# Altium PCB classyTKL_SMK.PcbDoc (part 2 of 2)
Units mm, origin at the board's own origin, x right, y up, seen from the top; angles counter-clockwise.
Board outline 346.59 x 122.85 mm, 2 copper layers (Component Side, Bottom Layer), stack 1.571 mm thick; 201 components, 128 nets, 842 pads, 69 vias.
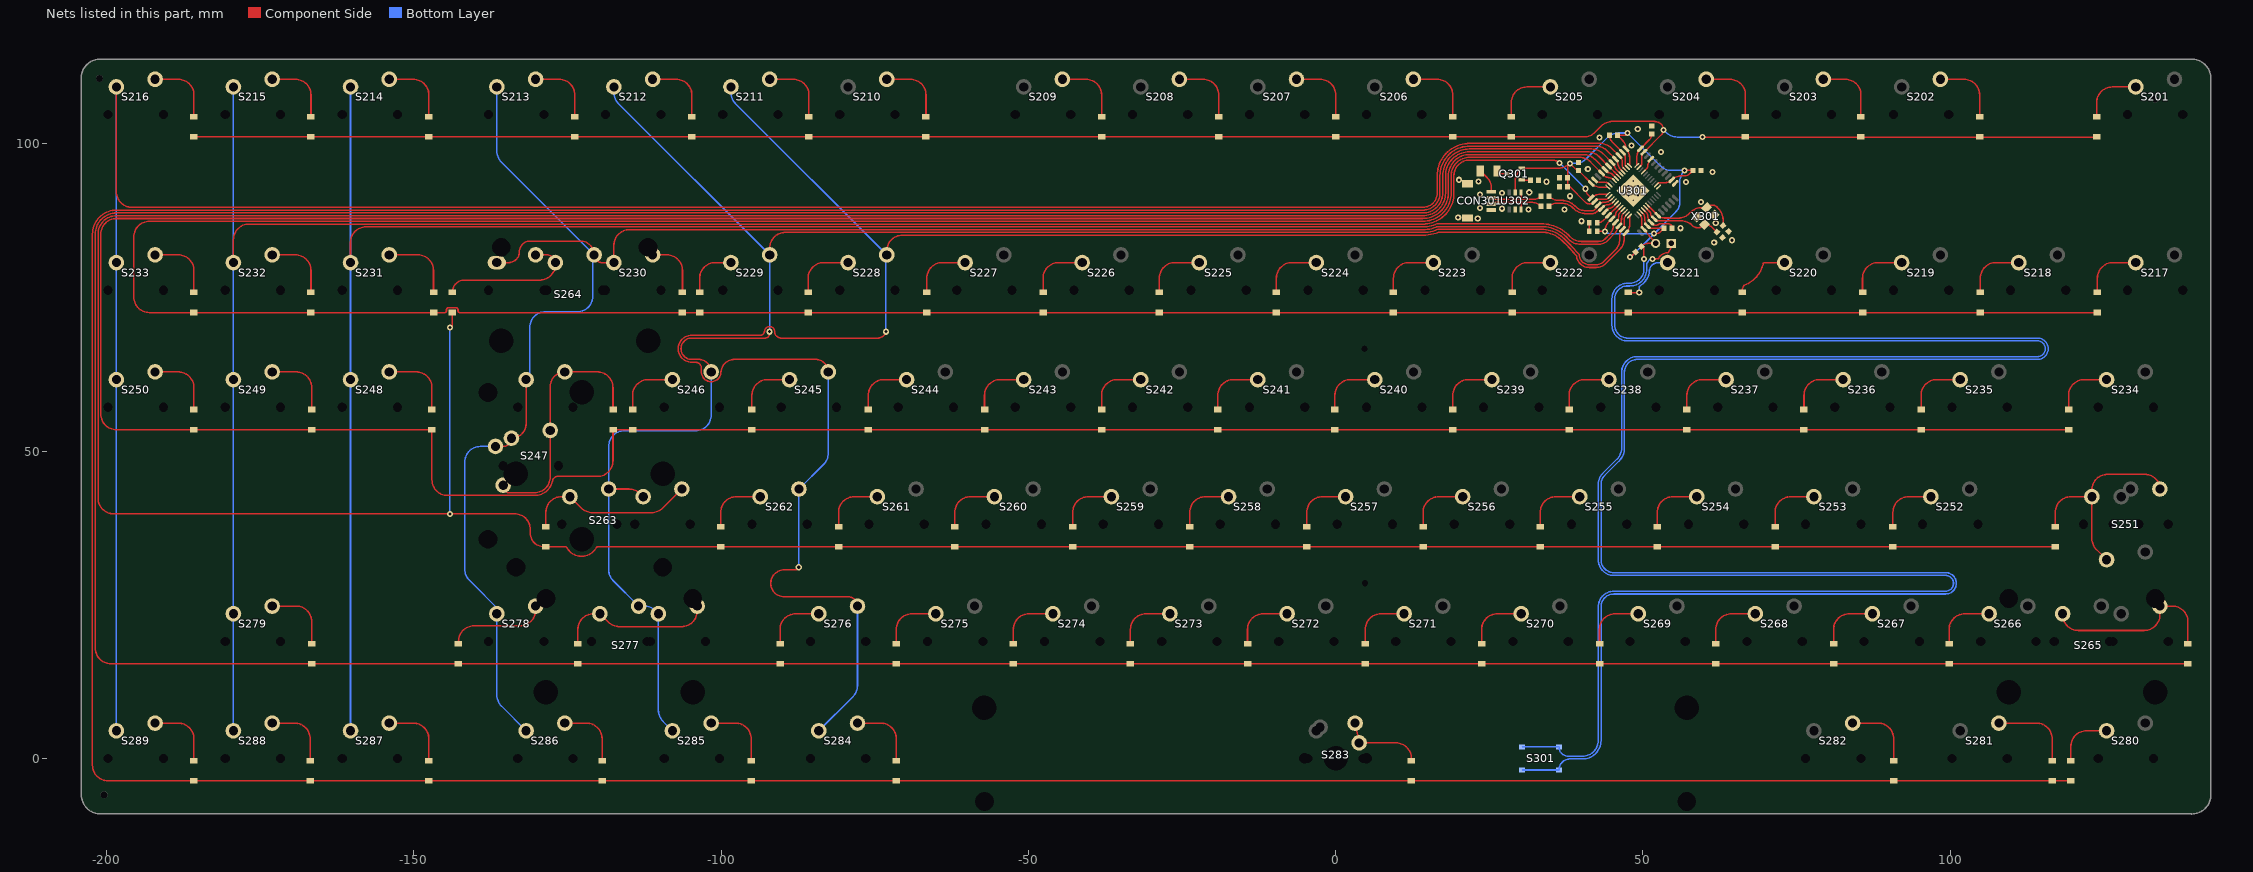
[diagram p2: the nets of this part, all layers, seen from the top]

## Via types
v1: diameter 1, hole 0.5, Component Side to Bottom Layer, tented both sides, 60 vias
v2: diameter 0.6, hole 0.3, Component Side to Bottom Layer, tented bottom, 9 vias

## Nets (pads, with @x,y where several pads share a name; then routed paths per layer and width w, separated by ;. In a path a pad name is that pad's centre, name@x,y a point inside that pad or via, vN(x,y) a via of type N, cw(c..) or ccw(c..) an arc to the next point about the centre after c; other vN are vias at no path point) (continued)
col12: S211.2 S228.2 S245.2 S262.2 S276.2 S284.2 U301.11 | length 329
  Component Side w0.254: -103.222,62.866 cw(c-101.626,62.9) -103.222,62.932 ; -100.037,62.734 cw(c-101.626,62.9) -103.222,62.932 ; -100.037,62.735 ccw(c-101.626,62.9) -100.029,62.914 cw(c-99.775,62.917) -100.029,62.916 cw(c-99.775,62.917) -100.027,62.941 cw(c-97.831,62.734) -97.831,64.94 -84.616,64.94 cw(c-84.616,62.9) S245.2@-82.576,62.9 ; -92.936,69.591 ccw(c-92.121,69.45) -92.948,69.478 ; -91.294,69.469 cw(c-92.121,69.45) -91.294,69.447 ; v1@-87.249,31.369 cw(c-87.925,31.369) -87.925,30.693 -89.737,30.693 ccw(c-89.737,28.504) -89.737,26.315 -79.328,26.315 cw(c-79.328,24.8) S276.2@-77.813,24.8 ; v1@-73.198,69.704 cw(c-74.492,69.704) -74.492,68.41 -90.235,68.41 cw(c-90.235,69.469) -91.294,69.447 ; S228.2@-73.051,81.95 -73.051,82.607 cw(c-70.511,82.607) -70.511,85.147 14.198,85.147 ccw(c14.198,92.004) 16.374,85.501 ccw(c14.198,92.004) 16.734,85.633 cw(c16.828,85.397) 16.829,85.651 33.475,85.651 cw(c33.475,80.841) 36.875,84.244 cw(c33.475,80.841) 36.876,84.242 37.826,83.292 37.852,83.267 37.893,83.225 37.903,83.215 cw(c37.724,83.035) 37.91,83.208 37.921,83.196 cw(c36.927,82.266) 37.929,83.187 37.931,83.186 39.145,81.865 cw(c38.959,81.693) 39.211,81.721 ccw(c41.249,81.95) 39.264,81.437 ccw(c41.249,81.95) 40.083,80.263 ccw(c41.249,81.95) 41.249,79.899 ccw(c41.249,81.95) 41.268,79.899 cw(c41.27,79.645) 41.272,79.899 ccw(c41.287,81.361) 41.287,79.899 42.43,79.899 ccw(c42.43,81.985) 43.905,80.51 46.318,82.923 ; 46.319,82.924 ccw(c44.851,84.39) 46.926,84.39 46.926,85.25 U301.11@47.226,85.55 47.417,85.741 ccw(c46.426,86.732) 47.827,86.732 U301.11@47.827,88.273 ; -103.222,62.932 ccw(c-103.476,62.937) -103.222,62.933 ccw(c-103.476,62.937) -103.222,62.938 -103.222,63.478 ccw(c-104.231,63.478) -104.231,64.486 -104.796,64.486 cw(c-104.796,66.675) -104.796,68.864 -93.663,68.864 ccw(c-93.663,69.591) -92.954,69.43 ccw(c-93.201,69.487) -92.948,69.477 ; -92.948,69.478 cw(c-92.121,69.45) -91.294,69.447
  Bottom Layer w0.254: S211.2@-98.4,109.275 -98.4,108.352 ccw(c-95.86,108.352) -97.791,106.701 ccw(c-95.86,108.352) -97.657,106.556 S228.2@-73.051,81.95 ccw(c-73.051,81.802) -73.198,81.802 v1(-73.198,69.45) ; v1(-87.376,31.115) ccw(c-87.376,31.153) -87.338,31.153 S262.2@-87.338,43.85 -83.319,47.869 ccw(c-85.116,49.665) -82.576,49.665 S245.2@-82.576,62.9 ; S284.2@-84.112,4.5 -78.557,10.056 ccw(c-80.353,11.852) -77.813,11.852 S276.2@-77.813,24.8
col13: S212.2 S229.2 S246.2 S263.2 S277.2 S285.2 U301.10 | length 308.6
  Component Side w0.254: S263.2@-118.301,43.85 -114.996,43.85 cw(c-114.996,41.31) -113.2,43.106 S263.2@-112.694,42.6 ; S246.2@-101.626,62.9 ccw(c-103.666,62.9) -103.666,64.94 -104.796,64.94 cw(c-104.796,66.675) -104.796,68.41 -92.88,68.41 ccw(c-92.88,69.215) v1@-92.075,69.215 ; S229.2@-92.101,81.95 -92.101,83.061 cw(c-89.561,83.061) -89.561,85.601 14.198,85.601 ccw(c14.198,92.004) 16.23,85.932 ccw(c14.198,92.004) 16.642,86.086 cw(c16.739,85.851) 16.741,86.105 33.475,86.105 cw(c33.475,80.841) 37.197,84.563 38.234,83.527 38.254,83.505 cw(c36.927,82.266) 38.265,83.493 39.634,82.005 cw(c39.399,81.908) 39.653,81.913 ccw(c41.249,81.95) 39.703,81.55 ccw(c41.249,81.95) 39.884,81.122 ccw(c41.249,81.95) 41.249,80.353 ccw(c41.249,81.95) 41.267,80.353 cw(c41.27,80.099) 41.274,80.353 ccw(c41.287,81.361) 41.287,80.353 42.43,80.353 ccw(c42.43,81.985) 43.584,80.831 45.484,82.731 ccw(c43.688,84.527) 46.228,84.527 46.228,85.072 cw(c47.705,85.072) U301.10@46.46,85.867 ; U301.10@46.661,86.116 ccw(c47.705,85.072) U301.10@46.46,85.867 ; U301.10@47.474,88.626 47.283,88.435 ccw(c48.032,87.686) 46.972,87.686 46.972,86.82 cw(c45.908,86.82) 46.827,86.282 cw(c45.908,86.82) 46.661,86.067 U301.10@46.46,85.867
  Bottom Layer w0.254: S263.2@-117.794,43.344 S263.2@-118.301,43.85 ; S212.2@-117.45,109.275 -117.45,108.352 ccw(c-114.91,108.352) -116.841,106.701 ccw(c-114.91,108.352) -116.707,106.556 S229.2@-92.101,81.95 -92.101,69.47 cw(c-92.121,69.47) v1(-92.121,69.45) ; S277.2@-110.231,24.13 S277.2@-109.913,24.13 ; S285.2@-107.925,4.5 -109.462,6.037 cw(c-107.665,7.833) -110.205,7.833 S277.2@-110.205,23.55 -110.712,24.056 ccw(c-112.508,22.26) -112.508,24.8 S277.2@-113.431,24.8 -117.557,28.926 cw(c-115.761,30.722) -118.301,30.722 S263.2@-118.301,43.85 ; S246.2@-101.626,62.9 -101.626,55.88 cw(c-104.166,55.88) -104.166,53.34 -115.761,53.34 ccw(c-115.761,50.8) -118.301,50.8 S263.2@-118.301,43.85
col14: S213.2 S230.2 S247.2 S264.2 S278.2 S286.2 U301.9 | length 326.3
  Component Side w0.254: S247.2@-136.719,50.775 -135.469,50.775 ccw(c-135.469,52.125) S247.2@-134.119,52.125 ccw(c-134.119,54.506) -131.738,54.487 ccw(c-134.119,54.506) -131.738,54.506 S247.2@-131.738,61.65 ; S264.2@-136.5,80.7 -134.565,80.7 ccw(c-134.565,82.423) -133.276,81.28 ccw(c-134.565,82.423) -132.842,82.423 cw(c-131.064,82.423) -131.064,84.201 -122.927,84.201 cw(c-122.927,81.95) S264.2@-120.676,81.95 ccw(c-119.426,81.95) -120.481,81.28 ccw(c-119.426,81.95) -119.426,80.7 S230.2@-117.45,80.7 -117.45,83.515 cw(c-114.91,83.515) -114.91,86.055 14.198,86.055 ccw(c14.198,92.004) 16.32,86.446 ccw(c14.198,92.004) 16.547,86.538 cw(c16.648,86.305) 16.649,86.559 33.475,86.559 cw(c33.475,80.841) 37.516,84.886 cw(c33.475,80.841) 37.518,84.884 37.982,84.42 ccw(c39.778,86.216) 39.778,83.676 42.909,83.676 ccw(c42.909,85.41) 44.136,84.184 45.449,85.497 ccw(c44.53,86.416) 45.829,86.416 U301.9@46.095,86.682 ccw(c45.101,87.675) 46.506,87.675 46.506,87.94 cw(c47.535,87.94) 46.808,88.667 U301.9@47.12,88.98
  Bottom Layer w0.254: S247.2@-136.719,50.775 -139.187,50.775 ccw(c-139.187,48.235) -141.727,48.235 -141.727,30.82 ccw(c-139.187,30.82) -140.983,29.024 S278.2@-135.891,23.932 ; S278.2@-136.5,23.55 -136.5,10.315 ccw(c-133.96,10.315) -135.757,8.519 S286.2@-131.737,4.5 ; S213.2@-136.5,109.275 -136.5,98.827 ccw(c-133.96,98.827) -135.757,97.031 S264.2@-120.676,81.95 ccw(c-120.137,81.412) -120.899,81.412 -120.899,75.158 cw(c-123.357,75.158) -123.357,72.7 -128.588,72.7 ccw(c-128.588,70.16) -131.128,70.16 S247.2@-131.128,62.23 ; S230.2@-117.476,81.28 S230.2@-116.841,81.28
col15: S214.2 S231.2 S248.2 S287.2 U301.8 | length 320.5
  Component Side w0.254: S231.2@-160.312,80.7 -160.312,83.969 cw(c-157.772,83.969) -157.772,86.509 14.198,86.509 ccw(c14.198,92.004) 15.901,86.779 ccw(c14.198,92.004) 16.448,86.991 cw(c16.552,86.759) 16.554,87.013 33.475,87.013 cw(c33.475,80.841) 37.839,85.205 38.17,84.874 ccw(c39.967,86.67) 39.967,84.13 42.721,84.13 ccw(c42.721,85.864) 43.947,84.638 44.479,85.17 ccw(c42.725,86.924) 44.582,85.279 ccw(c42.725,86.924) 45.206,86.924 U301.8@45.529,87.247 45.714,87.432 ccw(c44.896,88.25) 46.052,88.25 46.052,88.321 cw(c46.772,88.321) 46.263,88.83 U301.8@46.767,89.333
  Bottom Layer w0.254: S287.2@-160.312,4.5 S248.2@-160.312,61.65 S231.2@-160.312,80.7 S214.2@-160.312,109.275
col16: S215.2 S232.2 S249.2 S279.2 S288.2 U301.1 | length 343.7
  Component Side w0.254: S232.2@-179.363,80.7 -179.363,84.423 cw(c-176.823,84.423) -176.823,86.963 14.198,86.963 ccw(c14.198,92.004) 19.239,92.004 19.239,94.828 cw(c21.779,94.828) 21.779,97.368 35.322,97.368 cw(c35.322,95.774) 35.61,97.342 cw(c35.322,95.774) v1(36.449,96.901) ; v1(40.64,92.71) ccw(c42.025,92.71) 41.046,91.731 U301.1@41.569,91.207 cw(c43.02,89.756) 43.02,91.808 U301.1@44.292,91.808
  Bottom Layer w0.254: S288.2@-179.363,4.5 S279.2@-179.363,23.55 S249.2@-179.363,61.65 S232.2@-179.363,80.7 S215.2@-179.363,109.275 ; v1(36.449,96.901) v1(40.64,92.71)
col17: S216.2 S233.2 S250.2 S289.2 U301.36 | length 378.3
  Component Side w0.254: S216.2@-198.413,109.275 -198.413,92.227 ccw(c-195.873,92.227) -195.873,89.687 14.198,89.687 ccw(c14.198,92.004) 16.515,92.004 16.515,94.828 cw(c21.779,94.828) 21.779,100.092 43.052,100.092 cw(c43.052,97.552) 44.848,99.348 U301.36@46.095,98.101 46.36,97.836 cw(c45.747,97.223) 46.614,97.223 46.614,96.576 ccw(c47.259,96.576) 46.803,96.12 U301.36@47.12,95.803
  Bottom Layer w0.254: S289.2@-198.413,4.5 S250.2@-198.413,61.65 S233.2@-198.413,80.7 S216.2@-198.413,109.275
D_N: CON301.2 R305.2 U302.4 | length 9.2
  Component Side w0.254: CON301.2@25.344,91.24 ccw(c25.999,91.895) 25.999,90.969 30.104,90.969 ; U302.4@30.165,91.934 30.165,91.116 cw(c29.957,91.116) 30.104,90.969 ; R305.2@33.392,91.496 cw(c32.118,92.769) 32.352,90.984 cw(c32.118,92.769) 32.118,90.969 30.104,90.969
D_P: CON301.3 R306.2 U302.3 | length 9.3
  Component Side w0.254: CON301.3@25.344,90.24 cw(c25.999,89.585) 25.999,90.511 31.783,90.511 cw(c31.783,88.236) 32.246,90.464 cw(c31.783,88.236) R306.2@33.392,89.845 ; 30.104,90.502 cw(c29.957,90.355) 30.165,90.355 U302.3@30.165,89.534
D_PRE_N: R305.1 U301.3 | length 11.7
  Component Side w0.254: R305.1@34.692,91.496 ccw(c36.326,93.13) 36.326,90.819 36.788,90.819 ; 36.788,90.81 cw(c36.788,87.813) 38.907,89.932 38.994,89.845 ccw(c40.723,91.573) 40.723,89.129 41.685,89.129 ccw(c41.685,89.839) 42.186,89.336 42.542,89.692 ccw(c42.159,90.076) U301.3@42.701,90.076 cw(c43.786,88.991) 43.786,90.525 43.82,90.525 ccw(c43.82,91.979) 44.344,90.623 ccw(c43.82,91.979) 44.387,90.64 ccw(c43.82,91.979) 44.849,90.951 U301.3@44.999,91.101
D_PRE_P: R306.1 U301.4 | length 12
  Component Side w0.254: R306.1@34.692,89.845 cw(c35.918,88.619) 35.918,90.353 36.788,90.353 cw(c36.788,87.813) 38.584,89.609 38.671,89.522 ccw(c40.723,91.573) 40.723,88.672 41.896,88.672 ; 41.661,88.663 41.762,88.663 ccw(c41.762,89.664) 41.896,88.672 ; U301.4@45.212,90.607 45.044,90.439 cw(c44.208,91.275) 44.661,90.183 cw(c44.208,91.275) 44.496,90.128 cw(c44.208,91.275) 44.208,90.093 ccw(c44.208,89.226) 43.595,89.839 U301.4@43.266,89.51 ccw(c43.266,88.925) 42.853,89.339 42.47,88.956 cw(c41.762,89.664) 41.896,88.672
GND: C301.1 C302.1 C303.1 C304.1 C305.1 C306.1 C307.1 C308.1 C309.1 C310.1 CON301.4 CON301.5 CON302.1 R302.2 R307.2 S301.2 U301.5 U301.15 U301.23 U301.35 U301.43 U302.2 X301.2 X301.4 | length 375.1
  Component Side w0.254: C302.1@41.265,85.781 C301.1@41.265,87.178 ; U301.43@42.135,94.142 ccw(c43.003,95.01) 43.003,93.782 43.693,93.782 cw(c43.693,92.579) U301.43@44.544,93.43 ; U301.5@43.832,88.944 44.307,89.419 cw(c44.669,89.057) 44.669,89.569 ccw(c44.669,90.081) 45.031,89.719 U301.5@45.706,90.394 ; U301.43@44.544,93.43 U301.43@44.645,93.328 ; C306.1@44.567,101.402 ccw(c46.117,101.402) 44.699,100.778 ccw(c46.117,101.402) 45.021,100.306 U301.35@46.661,98.667 46.847,98.481 cw(c46.253,97.888) 47.092,97.888 47.092,96.538 U301.35@47.474,96.157 ; v2(46.855,92.392) v2(48.411,92.392) U301.43@48.411,90.977 ; v1(48.138,99.751) v1@48.392,99.751 ; U301.15@50.055,89.333 50.505,88.882 cw(c49.781,88.158) 50.805,88.158 ccw(c51.83,88.158) 51.105,87.434 U301.15@51.292,87.247 51.597,86.943 ccw(c51.948,87.295) 51.948,86.797 52.249,86.797 ccw(c52.249,87.27) 52.583,86.935 cw(c52.838,86.681) 52.838,87.041 54.026,87.041 cw(c54.026,86.208) 54.615,86.797 cw(c54.303,86.484) 54.745,86.484 C303.1@54.745,86.289 ; v1(51.562,81.28) 52.07,81.28 ccw(c52.07,83.82) 52.388,81.3 ccw(c52.356,81.552) 52.582,81.435 cw(c54,80.7) 53.975,82.297 ccw(c53.971,82.551) 54.182,82.409 ccw(c52.07,83.82) CON302.1@54.61,83.82
  Bottom Layer w0.254: S301.2@30.338,-1.875 S301.2@36.337,-1.875 cw(c38.139,-1.875) 38.139,-0.073 40.186,-0.073 ccw(c40.186,2.921) 43.18,2.921 43.18,24.683 cw(c45.266,24.683) 43.803,26.17 cw(c45.266,24.683) 45.266,26.769 99.262,26.769 ccw(c99.262,28.504) 99.262,30.239 45.266,30.239 cw(c45.266,32.325) 43.855,30.789 cw(c45.266,32.325) 43.18,32.325 43.18,44.646 ; 43.189,44.83 ccw(c45.143,44.646) 43.18,44.646 ; v1(51.562,81.28) ccw(c51.562,80.337) 51.041,81.123 ccw(c51.181,80.911) 51.001,81.09 ccw(c51.181,80.911) 50.942,80.998 cw(c50.165,81.28) 50.717,80.665 ccw(c50.887,80.476) 50.639,80.528 ccw(c51.562,80.337) 50.619,80.337 50.619,79.629 cw(c47.879,79.629) 47.879,76.889 47.498,76.889 ccw(c47.498,74.803) 47.155,76.861 ccw(c47.498,74.803) 45.444,75.166 ccw(c47.498,74.803) 45.412,74.803 45.412,70.496 ccw(c47.498,70.496) 46.397,68.724 ccw(c47.498,70.496) 47.498,68.41 53.1,68.41 54.483,68.41 114.204,68.41 cw(c114.204,66.675) 114.204,64.94 49.076,64.94 ccw(c49.076,62.854) 47.422,64.125 ccw(c49.076,62.854) 46.99,62.854 46.99,50.509 cw(c43.996,50.509) 46.113,48.392 43.755,46.034 ccw(c45.143,44.646) 43.18,44.646
  other v1: 61.595,83.947 64.516,84.328 56.139,86.289 61.849,87.122 40.01,87.432 23.114,87.884 19.939,88.011 31.374,89.337 37.216,89.337 27.056,89.464 23.5,89.591 59.436,90.551 38.105,91.496 23.5,91.75 27.056,92.004 31.501,92.131 57.028,93.782 34.29,93.853 23.246,93.909 20.071,94.163 61.346,95.433 41.026,95.941 52.959,98.679 42.931,101.021 49.154,102.418
  other v2: 48.411,90.836 47.633,91.614 49.188,91.614 49.966,92.392 47.633,93.169 49.188,93.169 48.411,93.947
NetC301_2: C301.2 U301.6 | length 4.6
  Component Side w0.254: C301.2@42.565,87.178 ccw(c42.565,88.703) 43.643,87.624 ; 43.644,87.625 U301.6@44.398,88.379 44.398,88.39 46.048,90.04 U301.6@46.06,90.04
NetC307_2: C307.2 U301.17 X301.3 | length 16.1
  Component Side w0.254: U301.17@50.762,90.04 U301.17@52.423,88.379 ccw(c53.461,89.416) 53.461,87.949 54.369,87.949 54.378,87.94 55.773,87.94 ccw(c55.773,90.48) 57.569,88.684 57.785,88.9 cw(c59.581,87.104) 57.923,89.028 cw(c59.581,87.104) 59.581,89.644 X301.3@60.375,89.644 cw(c61.338,88.68) 61.338,90.043 cw(c61.338,89.117) 61.993,89.772 62.296,89.469 cw(c60.5,87.673) 63.04,87.673 C307.2@63.04,86.693
NetC308_2: C308.2 U301.16 X301.1 | length 13.6
  Component Side w0.254: U301.16@50.408,89.687 51.109,88.986 cw(c50.747,88.623) 51.259,88.623 ccw(c51.772,88.623) 51.409,88.262 U301.16@51.858,87.813 ; U301.16@51.858,87.813 ccw(c52.626,88.581) 52.626,87.495 54.181,87.495 54.19,87.486 56.242,87.486 cw(c56.242,84.946) 58.038,86.742 ccw(c58.96,87.664) 58.96,86.36 ccw(c58.96,87.651) 59.873,86.738 X301.1@60.021,86.886 cw(c60.021,84.97) 61.376,86.325 C308.2@62.024,85.677
NetD201_1: D201.1 S201.1 | length 10.1
  Component Side w0.254: D201.1@123.83,104.41 123.83,106.735 cw(c126.37,106.735) 126.37,109.275 S201.1@130.2,109.275
NetD202_1: D202.1 S202.1 | length 11.4
  Component Side w0.254: S202.1@98.399,110.525 102.24,110.525 cw(c102.24,107.985) 104.78,107.985 D202.1@104.78,104.41
NetD203_1: D203.1 S203.1 | length 11.2
  Component Side w0.254: S203.1@79.349,110.525 82.936,110.525 cw(c82.936,107.985) 85.476,107.985 D203.1@85.476,104.41
NetD204_1: D204.1 S204.1 | length 11.4
  Component Side w0.254: S204.1@60.299,110.525 64.14,110.525 cw(c64.14,107.985) 66.68,107.985 D204.1@66.68,104.41
NetD205_1: D205.1 S205.1 | length 10.1
  Component Side w0.254: D205.1@28.58,104.41 28.58,106.735 cw(c31.12,106.735) 31.12,109.275 S205.1@34.95,109.275
NetD206_1: D206.1 S206.1 | length 11.4
  Component Side w0.254: S206.1@12.644,110.525 16.515,110.525 cw(c16.515,107.985) 19.055,107.985 D206.1@19.055,104.41
NetD207_1: D207.1 S207.1 | length 11.4
  Component Side w0.254: S207.1@-6.376,110.525 -2.535,110.525 cw(c-2.535,107.985) 0.005,107.985 D207.1@0.005,104.41
NetD208_1: D208.1 S208.1 | length 11.4
  Component Side w0.254: S208.1@-25.426,110.525 -21.585,110.525 cw(c-21.585,107.985) -19.045,107.985 D208.1@-19.045,104.41
NetD209_1: D209.1 S209.1 | length 11.4
  Component Side w0.254: S209.1@-44.476,110.525 -40.635,110.525 cw(c-40.635,107.985) -38.095,107.985 D209.1@-38.095,104.41
NetD210_1: D210.1 S210.1 | length 11.4
  Component Side w0.254: S210.1@-73.051,110.525 -69.21,110.525 cw(c-69.21,107.985) -66.67,107.985 D210.1@-66.67,104.41
NetD211_1: D211.1 S211.1 | length 11.4
  Component Side w0.254: S211.1@-92.101,110.525 -88.26,110.525 cw(c-88.26,107.985) -85.72,107.985 D211.1@-85.72,104.41
NetD212_1: D212.1 S212.1 | length 11.4
  Component Side w0.254: S212.1@-111.151,110.525 -107.31,110.525 cw(c-107.31,107.985) -104.77,107.985 D212.1@-104.77,104.41
NetD213_1: D213.1 S213.1 | length 11.4
  Component Side w0.254: S213.1@-130.201,110.525 -126.36,110.525 cw(c-126.36,107.985) -123.82,107.985 D213.1@-123.82,104.41
NetD214_1: D214.1 S214.1 | length 11.5
  Component Side w0.254: S214.1@-154.013,110.525 -150.109,110.525 cw(c-150.109,107.985) -147.569,107.985 D214.1@-147.569,104.41
NetD215_1: D215.1 S215.1 | length 11.3
  Component Side w0.254: S215.1@-173.063,110.525 -169.286,110.525 cw(c-169.286,107.985) -166.746,107.985 D215.1@-166.746,104.41
NetD216_1: D216.1 S216.1 | length 11.3
  Component Side w0.254: S216.1@-192.113,110.525 -188.336,110.525 cw(c-188.336,107.985) -185.796,107.985 D216.1@-185.796,104.41
NetD217_1: D217.1 S217.1 | length 10
  Component Side w0.254: D217.1@123.957,75.835 123.957,78.16 cw(c126.497,78.16) 126.497,80.7 S217.1@130.2,80.7
NetD218_1: D218.1 S218.1 | length 10
  Component Side w0.254: D218.1@104.907,75.835 104.907,78.16 cw(c107.447,78.16) 107.447,80.7 S218.1@111.15,80.7
NetD219_1: D219.1 S219.1 | length 10.1
  Component Side w0.254: D219.1@85.73,75.835 85.73,78.16 cw(c88.27,78.16) 88.27,80.7 S219.1@92.1,80.7
NetD220_1: D220.1 S220.1 | length 9.3
  Component Side w0.254: D220.1@66.172,76.226 cw(c67.4,76.226) 66.391,76.925 cw(c66.599,76.779) 66.511,77.017 ccw(c64.848,81.531) 67.4,77.453 ccw(c64.848,81.531) 68.21,78.091 ccw(c64.848,81.531) 69.135,79.349 ccw(c64.848,81.531) 69.54,80.47 cw(c69.788,80.414) 69.723,80.659 cw(c70.032,79.502) 70.032,80.7 S220.1@73.05,80.7
NetD221_1: D221.1 S221.1 | length 10.3
  Component Side w0.254: D221.1@47.63,75.835 47.63,75.819 v1(49.403,75.819) ; S221.1@53.876,81.28 S221.1@54.609,81.28
  Bottom Layer w0.254: v1(49.403,75.819) 49.403,76.675 cw(c49.657,76.675) 49.526,76.892 ccw(c47.879,79.629) 51.05,79.248 ; 51.05,79.249 ccw(c47.879,79.629) 51.069,79.471 cw(c51.323,79.458) 51.069,79.472 cw(c51.323,79.458) 51.073,79.503 cw(c52.502,79.248) 51.669,80.437 cw(c51.814,80.229) 51.754,80.476 ; 51.755,80.476 ccw(c51.562,81.28) 52.05,80.612 cw(c52.2,80.407) 52.051,80.613 cw(c52.2,80.407) 52.137,80.653 cw(c52.502,79.248) 52.502,80.7 S221.1@54,80.7
NetD222_1: D222.1 S222.1 | length 10
  Component Side w0.254: D222.1@28.707,75.835 28.707,78.16 cw(c31.247,78.16) 31.247,80.7 S222.1@34.95,80.7
NetD223_1: D223.1 S223.1 | length 10.3
  Component Side w0.254: D223.1@9.403,75.835 9.403,78.16 cw(c11.943,78.16) 11.943,80.7 S223.1@15.9,80.7
NetD224_1: D224.1 S224.1 | length 10.3
  Component Side w0.254: D224.1@-9.647,75.835 -9.647,78.16 cw(c-7.107,78.16) -7.107,80.7 S224.1@-3.15,80.7
NetD225_1: D225.1 S225.1 | length 10.3
  Component Side w0.254: D225.1@-28.697,75.835 -28.697,78.16 cw(c-26.157,78.16) -26.157,80.7 S225.1@-22.2,80.7
NetD226_1: D226.1 S226.1 | length 10.1
  Component Side w0.254: D226.1@-47.62,75.835 -47.62,78.16 cw(c-45.08,78.16) -45.08,80.7 S226.1@-41.25,80.7
NetD227_1: D227.1 S227.1 | length 10
  Component Side w0.254: D227.1@-66.543,75.835 -66.543,78.16 cw(c-64.003,78.16) -64.003,80.7 S227.1@-60.3,80.7
NetD228_1: D228.1 S228.1 | length 10.3
  Component Side w0.254: D228.1@-85.847,75.835 -85.847,78.16 cw(c-83.307,78.16) -83.307,80.7 S228.1@-79.35,80.7
NetD229_1: D229.1 S229.1 | length 8.9
  Component Side w0.254: D229.1@-103.5,75.835 -103.5,78.16 cw(c-100.96,78.16) -100.96,80.7 S229.1@-98.4,80.7
NetD230_1: D230.1 S230.1 | length 9.9
  Component Side w0.254: S230.1@-111.151,81.95 -108.834,81.95 cw(c-108.834,79.41) -106.294,79.41 D230.1@-106.294,75.835
NetD231_1: D231.1 S231.1 | length 12.2
  Component Side w0.254: S231.1@-154.013,81.95 -149.347,81.95 cw(c-149.347,79.41) -146.807,79.41 D231.1@-146.807,75.835
NetD232_1: D232.1 S232.1 | length 11.3
  Component Side w0.254: S232.1@-173.063,81.95 -169.286,81.95 cw(c-169.286,79.41) -166.746,79.41 D232.1@-166.746,75.835
NetD233_1: D233.1 S233.1 | length 11.3
  Component Side w0.254: S233.1@-192.113,81.95 -188.336,81.95 cw(c-188.336,79.41) -185.796,79.41 D233.1@-185.796,75.835
NetD234_1: D234.1 S234.2 | length 10
  Component Side w0.254: D234.1@119.258,56.785 119.258,59.11 cw(c121.798,59.11) 121.798,61.65 S234.2@125.437,61.65
NetD235_1: D235.1 S235.1 | length 10.1
  Component Side w0.254: D235.1@95.255,56.785 95.255,59.11 cw(c97.795,59.11) 97.795,61.65 S235.1@101.625,61.65
NetD236_1: D236.1 S236.1 | length 10.1
  Component Side w0.254: D236.1@76.205,56.785 76.205,59.11 cw(c78.745,59.11) 78.745,61.65 S236.1@82.575,61.65
NetD237_1: D237.1 S237.1 | length 10.1
  Component Side w0.254: D237.1@57.155,56.785 57.155,59.11 cw(c59.695,59.11) 59.695,61.65 S237.1@63.525,61.65
NetD238_1: D238.1 S238.1 | length 10.3
  Component Side w0.254: D238.1@37.978,56.785 37.978,59.11 cw(c40.518,59.11) 40.518,61.65 S238.1@44.475,61.65
NetD239_1: D239.1 S239.1 | length 10.1
  Component Side w0.254: D239.1@19.055,56.785 19.055,59.11 cw(c21.595,59.11) 21.595,61.65 S239.1@25.425,61.65
NetD240_1: D240.1 S240.1 | length 10.3
  Component Side w0.254: D240.1@-0.122,56.785 -0.122,59.11 cw(c2.418,59.11) 2.418,61.65 S240.1@6.375,61.65
NetD241_1: D241.1 S241.1 | length 10.3
  Component Side w0.254: D241.1@-19.172,56.785 -19.172,59.11 cw(c-16.632,59.11) -16.632,61.65 S241.1@-12.675,61.65
NetD242_1: D242.1 S242.1 | length 10.1
  Component Side w0.254: D242.1@-38.095,56.785 -38.095,59.11 cw(c-35.555,59.11) -35.555,61.65 S242.1@-31.725,61.65
NetD243_1: D243.1 S243.1 | length 10.1
  Component Side w0.254: D243.1@-57.145,56.785 -57.145,59.11 cw(c-54.605,59.11) -54.605,61.65 S243.1@-50.775,61.65
NetD244_1: D244.1 S244.1 | length 10
  Component Side w0.254: D244.1@-76.068,56.785 -76.068,59.11 cw(c-73.528,59.11) -73.528,61.65 S244.1@-69.825,61.65
NetD245_1: D245.1 S245.1 | length 9.9
  Component Side w0.254: D245.1@-94.991,56.785 -94.991,59.11 cw(c-92.451,59.11) -92.451,61.65 S245.1@-88.875,61.65
NetD246_1: D246.1 S246.1 | length 10.3
  Component Side w0.254: D246.1@-114.422,56.785 -114.422,59.11 cw(c-111.882,59.11) -111.882,61.65 S246.1@-107.925,61.65
NetD247_1: D247.1 S247.1 | length 41.2
  Component Side w0.254: S247.1@-135.469,44.475 ccw(c-134.047,44.475) -134.843,43.297 ccw(c-134.701,43.507) -134.701,43.253 -132.461,43.253 -130.359,43.253 ccw(c-130.359,45.793) -127.819,45.793 S247.1@-127.819,53.375 -127.819,60.519 cw(c-125.438,60.519) S247.1@-125.438,62.9 -120.137,62.9 cw(c-120.137,60.36) -117.597,60.36 D247.1@-117.597,56.785
NetD248_1: D248.1 S248.1 | length 12
  Component Side w0.254: S248.1@-154.013,62.9 -149.601,62.9 cw(c-149.601,60.36) -147.061,60.36 D248.1@-147.061,56.785
NetD249_1: D249.1 S249.1 | length 11.5
  Component Side w0.254: S249.1@-173.063,62.9 -169.159,62.9 cw(c-169.159,60.36) -166.619,60.36 D249.1@-166.619,56.785
NetD250_1: D250.1 S250.1 | length 11.3
  Component Side w0.254: S250.1@-192.113,62.9 -188.336,62.9 cw(c-188.336,60.36) -185.796,60.36 D250.1@-185.796,56.785
NetD251_1: D251.1 S251.1 | length 35.8
  Component Side w0.254: D251.1@117.099,37.735 117.099,40.06 cw(c119.639,40.06) 119.639,42.6 S251.1@123.056,42.6 ; S251.1@123.666,43.492 S251.1@123.686,43.492 ; S251.1@125.437,32.35 123.8,33.987 cw(c125.596,35.783) 123.056,35.783 S251.1@123.056,42.6 ; S251.1@134.118,43.85 ccw(c131.74,43.85) 131.74,46.228 125.596,46.228 ccw(c125.596,43.688) 123.056,43.688 S251.1@123.056,42.6
NetD252_1: D252.1 S252.1 | length 10
  Component Side w0.254: D252.1@90.683,37.735 90.683,40.06 cw(c93.223,40.06) 93.223,42.6 S252.1@96.862,42.6
NetD253_1: D253.1 S253.1 | length 10.1
  Component Side w0.254: D253.1@71.506,37.735 71.506,40.06 cw(c74.046,40.06) 74.046,42.6 S253.1@77.812,42.6
NetD254_1: D254.1 S254.1 | length 10.2
  Component Side w0.254: D254.1@52.329,37.735 52.329,40.06 cw(c54.869,40.06) 54.869,42.6 S254.1@58.762,42.6
NetD255_1: D255.1 S255.1 | length 10.2
  Component Side w0.254: D255.1@33.279,37.735 33.279,40.06 cw(c35.819,40.06) 35.819,42.6 S255.1@39.712,42.6
NetD256_1: D256.1 S256.1 | length 11
  Component Side w0.254: D256.1@14.229,37.735 14.229,40.06 cw(c16.769,40.06) 16.769,42.6 S256.1@20.662,42.6
  Bottom Layer w0.254: S256.1@20.706,42.614 S256.1@21.272,43.18
NetD257_1: D257.1 S257.1 | length 10.1
  Component Side w0.254: D257.1@-4.694,37.735 -4.694,40.06 cw(c-2.154,40.06) -2.154,42.6 S257.1@1.612,42.6
NetD258_1: D258.1 S258.1 | length 10.1
  Component Side w0.254: D258.1@-23.744,37.735 -23.744,40.06 cw(c-21.204,40.06) -21.204,42.6 S258.1@-17.438,42.6
NetD259_1: D259.1 S259.1 | length 10.1
  Component Side w0.254: D259.1@-42.794,37.735 -42.794,40.06 cw(c-40.254,40.06) -40.254,42.6 S259.1@-36.488,42.6
NetD260_1: D260.1 S260.1 | length 10.2
  Component Side w0.254: D260.1@-61.971,37.735 -61.971,40.06 cw(c-59.431,40.06) -59.431,42.6 S260.1@-55.538,42.6
NetD261_1: D261.1 S261.1 | length 10.1
  Component Side w0.254: D261.1@-80.894,37.735 -80.894,40.06 cw(c-78.354,40.06) -78.354,42.6 S261.1@-74.588,42.6
NetD262_1: D262.1 S262.1 | length 10.2
  Component Side w0.254: D262.1@-100.071,37.735 -100.071,40.06 cw(c-97.531,40.06) -97.531,42.6 S262.1@-93.638,42.6
NetD263_1: D263.1 S263.1 | length 32.3
  Component Side w0.254: D263.1@-128.519,37.735 -128.519,40.06 ; S263.1@-106.394,43.85 -109.495,40.749 cw(c-111.291,42.545) -111.291,40.005 -120.953,40.005 cw(c-120.953,42.545) -122.749,40.749 S263.1@-124.601,42.6 -125.979,42.6 ; -128.519,40.06 cw(c-125.979,40.06) -125.979,42.6 ; -128.519,40.06 cw(c-125.979,40.06) -125.979,42.6
NetD264_1: D264.1 S264.1 | length 23.6
  Component Side w0.254: D264.1@-143.759,75.835 cw(c-141.743,75.835) -141.743,77.851 -129.515,77.851 ccw(c-129.515,80.391) -126.975,80.391 -126.975,80.546 ccw(c-128.38,80.546) -128.38,81.95 S264.1@-130.201,81.95
NetD265_1: D265.1 S265.1 | length 29.9
  Component Side w0.254: S265.1@118.293,23.55 118.293,23.368 ccw(c120.833,23.368) 120.833,20.828 131.578,20.828 ccw(c131.578,23.368) 134.118,23.368 S265.1@134.118,24.8 136.149,24.8 cw(c136.149,22.26) 138.689,22.26 D265.1@138.689,18.685
NetD266_1: D266.1 S266.1 | length 10.3
  Component Side w0.254: D266.1@99.827,18.685 99.827,21.01 cw(c102.367,21.01) 102.367,23.55 S266.1@106.33,23.55
NetD267_1: D267.1 S267.1 | length 10.1
  Component Side w0.254: D267.1@81.031,18.685 81.031,21.01 cw(c83.571,21.01) 83.571,23.55 S267.1@87.337,23.55
NetD268_1: D268.1 S268.1 | length 10.2
  Component Side w0.254: D268.1@61.854,18.685 61.854,21.01 cw(c64.394,21.01) 64.394,23.55 S268.1@68.287,23.55
NetD269_1: D269.1 S269.1 | length 10.1
  Component Side w0.254: D269.1@42.931,18.685 42.931,21.01 cw(c45.471,21.01) 45.471,23.55 S269.1@49.237,23.55
NetD270_1: D270.1 S270.1 | length 10.2
  Component Side w0.254: D270.1@23.754,18.685 23.754,21.01 cw(c26.294,21.01) 26.294,23.55 S270.1@30.187,23.55
NetD271_1: D271.1 S271.1 | length 10.1
  Component Side w0.254: D271.1@4.831,18.685 4.831,21.01 cw(c7.371,21.01) 7.371,23.55 S271.1@11.137,23.55
NetD272_1: D272.1 S272.1 | length 10.2
  Component Side w0.254: D272.1@-14.346,18.685 -14.346,21.01 cw(c-11.806,21.01) -11.806,23.55 S272.1@-7.913,23.55
NetD273_1: D273.1 S273.1 | length 10.2
  Component Side w0.254: D273.1@-33.396,18.685 -33.396,21.01 cw(c-30.856,21.01) -30.856,23.55 S273.1@-26.963,23.55
NetD274_1: D274.1 S274.1 | length 10.2
  Component Side w0.254: D274.1@-52.446,18.685 -52.446,21.01 cw(c-49.906,21.01) -49.906,23.55 S274.1@-46.012,23.55
NetD275_1: D275.1 S275.1 | length 10.2
  Component Side w0.254: D275.1@-71.496,18.685 -71.496,21.01 cw(c-68.956,21.01) -68.956,23.55 S275.1@-65.063,23.55
NetD276_1: D276.1 S276.1 | length 10.1
  Component Side w0.254: D276.1@-90.419,18.685 -90.419,21.01 cw(c-87.879,21.01) -87.879,23.55 S276.1@-84.113,23.55
NetD277_1: D277.1 S277.1 | length 25.7
  Component Side w0.254: D277.1@-123.312,18.685 -123.312,21.01 cw(c-120.772,21.01) -120.772,23.55 S277.1@-119.73,23.55 -118.387,22.207 ccw(c-116.591,24.003) -116.591,21.463 -106.446,21.463 ccw(c-106.446,24.003) -103.906,24.003 S277.1@-103.906,24.337
NetD278_1: D278.1 S278.1 | length 16.1
  Component Side w0.254: D278.1@-142.743,19.05 cw(c-140.203,19.05) -140.203,21.59 -132.741,21.59 ccw(c-132.741,24.13) -130.201,24.13 S278.1@-130.201,24.8
NetD279_1: D279.1 S279.1 | length 11.5
  Component Side w0.254: S279.1@-173.063,24.8 -169.159,24.8 cw(c-169.159,22.26) -166.619,22.26 D279.1@-166.619,18.685
NetD280_1: D280.1 S280.2 | length 9.6
  Component Side w0.254: D280.1@119.639,-0.365 119.639,1.96 cw(c122.179,1.96) 122.179,4.5 S280.2@125.437,4.5
NetD281_1: D281.1 S281.1 | length 13.7
  Component Side w0.254: S281.1@107.925,5.75 114.051,5.75 cw(c114.051,3.21) 116.591,3.21 D281.1@116.591,-0.365
NetD282_1: D282.1 S282.1 | length 11.7
  Component Side w0.254: S282.1@84.112,5.75 88.27,5.75 cw(c88.27,3.21) 90.81,3.21 D282.1@90.81,-0.365
NetD283_1: D283.1 S283.1 | length 13.2
  Component Side w0.254: S283.1@3.15,5.75 S283.1@3.81,2.54 9.784,2.54 cw(c9.784,0) D283.1@12.324,0
NetD284_1: D284.1 S284.1 | length 11.3
  Component Side w0.254: S284.1@-77.813,5.75 -74.036,5.75 cw(c-74.036,3.21) -71.496,3.21 D284.1@-71.496,-0.365
NetD285_1: D285.1 S285.1 | length 11.5
  Component Side w0.254: S285.1@-101.625,5.75 -97.658,5.75 cw(c-97.658,3.21) -95.118,3.21 D285.1@-95.118,-0.365
NetD286_1: D286.1 S286.1 | length 11.1
  Component Side w0.254: S286.1@-125.438,5.75 -121.915,5.75 cw(c-121.915,3.21) -119.375,3.21 D286.1@-119.375,-0.365
NetD287_1: D287.1 S287.1 | length 11.5
  Component Side w0.254: S287.1@-154.013,5.75 -150.109,5.75 cw(c-150.109,3.21) -147.569,3.21 D287.1@-147.569,-0.365
NetD288_1: D288.1 S288.1 | length 11.2
  Component Side w0.254: S288.1@-173.063,5.75 -169.413,5.75 cw(c-169.413,3.21) -166.873,3.21 D288.1@-166.873,-0.365
NetD289_1: D289.1 S289.1 | length 11.3
  Component Side w0.254: S289.1@-192.113,5.75 -188.336,5.75 cw(c-188.336,3.21) -185.796,3.21 D289.1@-185.796,-0.365
NetF301_2: F301.2 Q301.3 | length 1.8
  Component Side w0.254: F301.2@26.242,95.631 ccw(c27.468,96.857) 27.468,95.123 Q301.3@27.883,95.123
NetQ301_1: Q301.1 R307.1 | length 1.5
  Component Side w0.254: Q301.1@30.283,94.173 ccw(c30.442,94.332) 30.442,94.107 R307.1@31.735,94.107
NetR302_1: R302.1 U301.33 | length 6
  Component Side w0.254: U301.33@48.994,96.51 48.994,97.782 cw(c51.046,97.782) U301.33@49.595,99.233 51.043,100.68 ccw(c50.082,101.641) R302.1@51.44,101.641
PC7: D201.2 D202.2 D203.2 D204.2 D205.2 D206.2 D207.2 D208.2 D209.2 D210.2 D211.2 D212.2 D213.2 D214.2 D215.2 D216.2 U301.32 | length 319.1
  Component Side w0.254: D216.2@-185.796,101.14 D215.2@-166.746,101.14 D214.2@-147.569,101.14 D213.2@-123.82,101.14 D212.2@-104.77,101.14 D211.2@-85.72,101.14 D210.2@-66.67,101.14 D209.2@-38.095,101.14 D208.2@-19.045,101.14 D207.2@0.005,101.14 D206.2@19.055,101.14 D205.2@28.58,101.14 40.398,101.14 ccw(c40.398,103.68) 42.194,101.884 43.234,102.924 cw(c45.03,101.128) 45.03,103.668 51.865,103.668 cw(c51.865,103.341) 51.981,103.647 ccw(c52.07,103.885) 52.06,103.631 cw(c52.004,102.291) v1(53.345,102.291) cw(c52.285,102.291) 53.035,101.541 U301.32@50.161,98.667 ; U301.32@49.348,96.157 49.626,96.435 ccw(c49.231,96.83) 49.789,96.83 49.789,97.956 cw(c50.563,97.956) 49.828,98.195 cw(c50.563,97.956) U301.32@50.016,98.502 ; v1(59.69,101.125) 123.83,101.125 D201.2@123.83,101.14
  Bottom Layer w0.254: v1(53.345,102.291) 53.768,101.869 ccw(c55.564,103.665) 55.564,101.125 v1(59.69,101.125)
PF0: D217.2 D218.2 D219.2 D220.2 D221.2 D222.2 D223.2 D224.2 D225.2 D226.2 D227.2 D228.2 D229.2 D230.2 D231.2 D232.2 D233.2 U301.41 | length 582.7
  Component Side w0.254: U301.41@45.208,94.18 ccw(c44.328,93.3) 44.328,94.544 cw(c44.328,95.348) 43.76,94.78 U301.41@43.266,95.273 41.461,97.078 ccw(c39.665,95.282) 39.665,97.822 21.779,97.822 ccw(c21.779,94.828) 18.785,94.828 18.785,92.004 cw(c14.198,92.004) 14.198,87.417 -193.04,87.417 ccw(c-193.04,84.877) -195.58,84.877 -195.58,75.105 ccw(c-193.04,75.105) -193.04,72.565 D233.2@-185.796,72.565 D232.2@-166.746,72.565 D231.2@-146.807,72.565 -144.95,72.565 ccw(c-144.95,72.819) -144.696,72.819 -144.696,73.02 cw(c-144.369,73.02) -144.369,73.347 -143.148,73.347 cw(c-143.148,73.02) -142.821,73.02 -142.821,72.819 ccw(c-142.567,72.819) -142.567,72.565 D230.2@-106.294,72.565 D229.2@-103.5,72.565 D228.2@-85.847,72.565 D227.2@-66.543,72.565 D226.2@-47.62,72.565 D225.2@-28.697,72.565 D224.2@-9.647,72.565 D223.2@9.403,72.565 D222.2@28.707,72.565 D221.2@47.63,72.565 D220.2@66.172,72.565 D219.2@85.73,72.565 D218.2@104.907,72.565 D217.2@123.957,72.565 ; U301.41@45.208,94.18 U301.41@45.352,94.036
PF1: D234.2 D235.2 D236.2 D237.2 D238.2 D239.2 D240.2 D241.2 D242.2 D243.2 D244.2 D245.2 D246.2 D247.2 D248.2 D249.2 D250.2 U301.40 | length 625.6
  Component Side w0.254: -127.476,44.985 ccw(c-130.359,45.793) -127.414,45.256 ; 45.089,95.006 ccw(c44.365,94.282) 44.365,95.306 U301.40@43.832,95.839 42.139,97.532 ccw(c40.343,95.736) 40.343,98.276 21.779,98.276 ccw(c21.779,94.828) 18.331,94.828 18.331,92.004 cw(c14.198,92.004) 14.198,87.871 -198.404,87.871 ccw(c-198.404,85.331) -200.944,85.331 -200.944,56.04 ccw(c-198.404,56.04) -198.404,53.5 -147.061,53.5 -147.061,45.339 ccw(c-144.521,45.339) -144.521,42.799 -130.359,42.799 ccw(c-130.359,45.793) -128.725,43.284 ccw(c-130.359,45.793) -127.864,44.138 ccw(c-130.359,45.793) -127.414,45.256 ; 45.089,95.006 U301.40@45.706,94.389 ; D234.2@119.258,53.515 D235.2@95.255,53.515 D236.2@76.205,53.515 D237.2@57.155,53.515 D238.2@37.978,53.515 D239.2@19.055,53.515 D240.2@-0.122,53.515 D241.2@-19.172,53.515 D242.2@-38.095,53.515 D243.2@-57.145,53.515 D244.2@-76.068,53.515 D245.2@-94.991,53.515 D246.2@-114.422,53.515 D247.2@-117.597,53.515 -117.597,48.443 cw(c-120.137,48.443) -120.137,45.903 -126.558,45.903 ccw(c-126.558,44.985) -127.378,45.398 ccw(c-127.151,45.283) -127.402,45.323 cw(c-130.359,45.793) -127.414,45.257 cw(c-130.359,45.793) -127.414,45.256
PF4: D251.2 D252.2 D253.2 D254.2 D255.2 D256.2 D257.2 D258.2 D259.2 D260.2 D261.2 D262.2 D263.2 D264.2 U301.39 | length 657.8
  Component Side w0.254: v1(-144.145,70.104) ccw(c-144.145,70.49) -143.759,70.49 D264.2@-143.759,72.565 ; U301.39@44.398,96.404 U301.39@46.06,94.743 ; U301.39@44.455,96.322 42.791,97.986 ccw(c40.995,96.19) 40.995,98.73 21.779,98.73 ccw(c21.779,94.828) 17.877,94.828 17.877,92.004 cw(c14.198,92.004) 14.198,88.325 -198.404,88.325 ccw(c-198.404,85.331) -201.398,85.331 -201.398,42.347 ccw(c-198.858,42.347) -198.858,39.807 v1(-144.14,39.807) -133.599,39.807 cw(c-133.599,37.267) -131.059,37.267 -131.059,36.64 ccw(c-128.883,36.64) -128.883,34.465 D263.2@-128.519,34.465 -125.36,34.465 cw(c-125.359,34.211) -125.137,34.335 ccw(c-122.714,35.687) -120.291,34.335 cw(c-120.069,34.211) -120.068,34.465 D262.2@-100.071,34.465 D261.2@-80.894,34.465 D260.2@-61.971,34.465 D259.2@-42.794,34.465 D258.2@-23.744,34.465 D257.2@-4.694,34.465 D256.2@14.229,34.465 D255.2@33.279,34.465 D254.2@52.329,34.465 D253.2@71.506,34.465 D252.2@90.683,34.465 D251.2@117.099,34.465
  Bottom Layer w0.254: v1(-144.14,39.807) v1@-144.14,69.616
PF5: D265.2 D266.2 D267.2 D268.2 D269.2 D270.2 D271.2 D272.2 D273.2 D274.2 D275.2 D276.2 D277.2 D278.2 D279.2 U301.38 | length 668.5
  Component Side w0.254: U301.38@44.963,96.957 43.48,98.44 ccw(c41.684,96.644) 41.684,99.184 21.779,99.184 ccw(c21.779,94.828) 17.423,94.828 17.423,92.004 cw(c14.198,92.004) 14.198,88.779 -198.404,88.779 ccw(c-198.404,85.331) -201.852,85.331 -201.852,17.955 ccw(c-199.312,17.955) -199.312,15.415 D279.2@-166.619,15.415 D278.2@-142.743,15.415 D277.2@-123.312,15.415 D276.2@-90.419,15.415 D275.2@-71.496,15.415 D274.2@-52.446,15.415 D273.2@-33.396,15.415 D272.2@-14.346,15.415 D271.2@4.831,15.415 D270.2@23.754,15.415 D269.2@42.931,15.415 D268.2@61.854,15.415 D267.2@81.031,15.415 D266.2@99.827,15.415 D265.2@138.689,15.415 ; U301.38@44.963,96.97 45.358,96.576 ccw(c46.382,96.576) 45.658,95.852 U301.38@46.413,95.096
PF6: D280.2 D281.2 D282.2 D283.2 D284.2 D285.2 D286.2 D287.2 D288.2 D289.2 U301.37 | length 670.3
  Component Side w0.254: U301.37@46.767,95.45 46.454,95.762 cw(c47.902,97.211) 46.16,96.133 cw(c47.902,97.211) 45.854,97.211 U301.37@45.529,97.536 44.171,98.894 ccw(c42.375,97.098) 42.375,99.638 21.779,99.638 ccw(c21.779,94.828) 16.969,94.828 16.969,92.004 cw(c14.198,92.004) 14.198,89.233 -198.404,89.233 ccw(c-198.404,85.331) -202.306,85.331 -202.306,-1.095 ccw(c-199.766,-1.095) -199.766,-3.635 D289.2@-185.796,-3.635 D288.2@-166.873,-3.635 D287.2@-147.569,-3.635 D286.2@-119.375,-3.635 D285.2@-95.118,-3.635 D284.2@-71.496,-3.635 D283.2@12.324,-3.635 D282.2@90.81,-3.635 D281.2@116.591,-3.635 D280.2@119.639,-3.635
RAW: CON301.1 F301.1 | length 4
  Component Side w0.254: F301.1@23.542,95.631 24.6,94.573 cw(c22.804,92.777) 25.344,92.777 CON301.1@25.344,92.24
RST: CON302.2 R301.2 S301.1 U301.13 | length 356.6
  Component Side w0.254: U301.13@49.348,88.626 49.527,88.447 cw(c48.893,87.813) 49.789,87.813 49.789,87.012 ccw(c51.057,87.012) U301.13@50.161,86.116 50.339,85.902 50.994,85.113 50.994,85.057 51.27,84.782 CON302.2@52.07,83.82 50.949,83.82 ccw(c50.949,82.112) R301.2@49.741,83.32 cw(c49.741,82.896) 50.165,82.896 v1(50.165,81.28)
  Bottom Layer w0.254: S301.1@30.338,1.875 S301.1@36.337,1.875 ccw(c37.831,1.875) 37.831,0.381 40.186,0.381 ccw(c40.186,2.921) 42.726,2.921 42.726,24.683 cw(c45.266,24.683) 45.266,27.223 99.262,27.223 ccw(c99.262,28.504) 99.262,29.785 45.266,29.785 cw(c45.266,32.325) 42.726,32.325 42.726,44.646 cw(c45.143,44.646) 43.434,46.355 45.792,48.713 ccw(c43.996,50.509) 46.536,50.509 46.536,62.854 cw(c49.076,62.854) 49.076,65.394 114.204,65.394 ccw(c114.204,66.675) 114.204,67.956 47.498,67.956 cw(c47.498,70.496) 44.958,70.496 44.958,74.803 cw(c47.498,74.803) 47.498,77.343 47.879,77.343 ccw(c47.879,79.629) 50.165,79.629 v1(50.165,81.28)
scroll_led: U301.30 | length 2.5
  Component Side w0.254: U301.30@50.055,95.45 50.63,96.025 ; 50.63,96.025 ccw(c50.206,96.449) 50.805,96.449 cw(c52.254,96.449) 51.23,97.473 U301.30@51.292,97.536
VCC: C302.2 C303.2 C304.2 C305.2 C306.2 C309.2 C310.2 Q301.2 R301.1 U301.2 U301.7 U301.14 U301.24 U301.34 U301.44 U302.5 | length 111.1
  Component Side w0.254: U302.5@29.215,92.109 29.215,93.953 cw(c31.755,93.953) 29.959,95.749 Q301.2@30.283,96.073 36.296,96.073 ccw(c36.296,98.613) 36.393,96.075 cw(c36.402,95.821) 36.413,96.075 ccw(c36.449,96.901) 36.63,96.094 cw(c36.686,95.846) 36.651,96.098 ccw(c36.296,98.613) v1@38.092,96.817 ; C310.2@37.739,93.02 37.739,95.946 cw(c38.989,95.946) v1@38.093,96.817 ; C310.2@38.12,93.02 40.669,90.472 ; 40.661,90.479 ccw(c41.159,90.978) 40.669,90.472 ; U301.2@42.135,90.641 42.043,90.549 cw(c41.262,91.33) 41.262,90.226 cw(c41.262,91.066) 40.669,90.472 ; U301.2@42.136,90.642 cw(c42.972,89.805) 42.972,90.988 43.82,90.988 ccw(c43.82,91.853) 44.432,91.241 U301.2@44.645,91.455 ; C302.2@42.565,85.781 v1(43.82,85.781) cw(c45.967,85.781) 44.448,87.298 ; U301.44@44.292,92.975 43.02,92.975 cw(c43.02,95.027) U301.44@41.569,93.576 41.569,93.605 C309.2@39.502,95.672 39.263,95.672 v1(38.105,96.83) ; 44.449,87.299 U301.7@44.963,87.813 45.419,88.268 ccw(c44.985,88.702) 45.598,88.702 cw(c46.01,88.702) 45.719,88.993 U301.7@46.413,89.687 ; v1(47.503,101.783) 47.122,101.402 C306.2@45.867,101.402 46.653,100.616 cw(c45.27,99.233) U301.34@47.226,99.233 cw(c45.775,97.782) 47.827,97.782 U301.34@47.827,96.51 ; v1(47.884,81.59) 48.011,81.59 R301.1@48.822,82.4 ; U301.14@49.701,88.98 49.984,88.697 cw(c49.227,87.94) 50.297,87.94 50.297,87.717 ccw(c51.762,87.717) U301.14@50.726,86.682 51.119,86.289 C303.2@53.458,86.289 52.875,85.706 cw(c52.135,86.445) 52.525,85.475 cw(c52.135,86.445) 52.135,85.4 v1(51.821,85.4) ; U301.24@52.176,93.328 52.449,93.601 cw(c52.71,93.34) 52.71,93.71 53.644,93.71 ccw(c53.644,95.184) 54.685,94.141 cw(c56.271,92.557) 56.271,94.798 56.647,94.798 ccw(c56.647,96.295) 57.706,95.236 C305.2@58.157,95.687 v1(56.774,95.687) ; v1@38.093,96.817 cw(c38.989,95.946) v1(38.105,96.83) ; v1@38.092,96.817 v1(38.105,96.83)
  Bottom Layer w0.254: v1(38.105,96.83) 38.958,96.83 ccw(c38.958,99.37) 40.754,97.574 44.22,101.039 cw(c46.016,99.243) 46.016,101.783 v1(47.503,101.783) 52.856,96.431 ccw(c54.652,98.227) 53.851,95.816 ccw(c54.652,98.227) 54.652,95.687 v1(56.774,95.687) 56.731,95.643 ccw(c58.465,93.909) 56.012,93.909 56.012,90.643 cw(c53.472,90.643) 55.269,88.847 v1(51.821,85.4) ; v1@43.91,85.564 cw(c44.127,85.781) v1(43.82,85.781) ccw(c44.74,86.701) 44.74,85.4 v1(51.821,85.4) ; v1(47.884,81.59) 48.011,81.59 v1(51.821,85.4)
pads on no net: S201. S202. S203. S204. S205. S206. S207. S208. S209. S210. S211. S212. S213. S214. S215. S216. S217. S218. S219. S220. S221. S222. S223. S224. S225. S226. S227. S228. S229. S230. S231. S232. S233. S234. S235. S236. S237. S238. S239. S240. S241. S242. S243. S244. S245. S246. S247. S248. S249. S250. S251. S252. S253. S254. S255. S256. S257. S258. S259. S260. S261. S262. S263. S264. S265. S266. S267. S268. S269. S270. S271. S272. S273. S274. S275. S276. S277. S278. S279. S280. S281. S282. S283. S284. S285. S286. S287. S288. S289. U301.42 U302.1 U302.6
copper on no net: | length 23.4
  Component Side w0.279: 32.136,0.738 cw(c28.418,0.614) 32.135,0.752

## Polygon pours and split planes (outlines as drawn)
GND on Bottom Layer "Bottom Layer-GND" (hatched 45Degree grid 0.508 track 0.203, remove dead copper, pour order 0): 21.087,86.035 22.738,86.035 ccw(c22.738,88.615) 24.563,86.79 24.988,87.215 cw(c26.124,86.079) 26.124,87.686 35.565,87.686 cw(c35.565,84.747) 37.643,86.825 ccw(c37.734,86.915) 37.644,86.824 37.643,86.825 39.022,85.446 ccw(c41.28,87.704) 41.28,84.511 56.012,84.511 cw(c56.012,81.572) 58.09,83.65 ccw(c58.181,83.74) 58.091,83.649 58.09,83.65 58.961,82.779 ccw(c61.219,85.037) 61.219,81.844 65.594,81.844 ccw(c65.594,83.675) 66.889,82.38 ccw(c64.63,84.638) 67.824,84.638 67.824,88.956 ccw(c64.63,88.956) 66.889,91.214 55.731,102.372 cw(c55.641,102.282) 55.731,102.372 ccw(c53.472,100.114) 53.472,103.307 45.344,103.307 ccw(c45.344,100.114) 43.086,102.372 ccw(c43.176,102.282) 43.086,102.372 39.167,98.453 cw(c39.258,98.363) 39.168,98.454 39.167,98.453 cw(c37.089,100.531) 37.089,97.592 21.087,97.592 ccw(c21.087,96.195) 19.69,96.195 19.69,87.432 ccw(c21.087,87.432)
GND on Component Side "Component Side-GND" (hatched 45Degree grid 0.508 track 0.203, remove dead copper, pour order 1): 21.087,86.035 22.738,86.035 ccw(c22.738,88.615) 24.563,86.79 24.988,87.215 cw(c26.124,86.079) 26.124,87.686 35.565,87.686 cw(c35.565,84.747) 37.643,86.825 ccw(c37.734,86.915) 37.644,86.824 37.643,86.825 39.022,85.446 ccw(c41.28,87.704) 41.28,84.511 56.012,84.511 cw(c56.012,81.572) 58.09,83.65 ccw(c58.181,83.74) 58.091,83.649 58.09,83.65 58.961,82.779 ccw(c61.219,85.037) 61.219,81.844 65.594,81.844 ccw(c65.594,83.675) 66.889,82.38 ccw(c64.63,84.638) 67.824,84.638 67.824,88.956 ccw(c64.63,88.956) 66.889,91.214 55.731,102.372 cw(c55.641,102.282) 55.731,102.372 ccw(c53.472,100.114) 53.472,103.307 45.344,103.307 ccw(c45.344,100.114) 43.086,102.372 ccw(c43.176,102.282) 43.086,102.372 39.167,98.453 cw(c39.258,98.363) 39.168,98.454 39.167,98.453 cw(c37.089,100.531) 37.089,97.592 21.087,97.592 ccw(c21.087,96.195) 19.69,96.195 19.69,87.432 ccw(c21.087,87.432)

## Other copper
Component Side:
  region: 1746 vertices and 2 holes, not listed, extent 25.4,-2.516 31.312,3.623
  region: 3595 vertices and 0 holes, not listed, extent -32.103,-3.251 -24.943,3.909
  text "Rev A3" at -4.318,-6.096 h3
Bottom Layer:
  text "Reset" at 36.521,-5.575 h3

## Silkscreen, mask and mechanical layers (free items; w line width, h text height)
Top Overlay:
  text "RESET" at 56.388,83.693 h0.75
Top Solder:
  drawing of 3 lines, arcs and shapes, not listed
  text "Rev A3" at -4.318,-6.096 h3
Solder Side:
  text "Reset" at 36.521,-5.575 h3
outline:
  lines w0.203: -52.991,85.4 -52.984,85.393
  lines w0.254: -204.032,-5.896 -204.032,110.685 cw(c-201.032,110.685) -201.032,113.685 ; -204,-5.896 ccw(c-201,-5.896) -201,-8.896 139.299,-8.896 ; -201.032,113.671 139.295,113.671 cw(c139.295,110.671) 142.295,110.671 142.295,-5.915 ; 139.299,-8.915 ccw(c139.299,-5.915) 142.299,-5.915
Mechanical 13:
  lines w0.254: -204.032,-5.896 -204.032,110.685 cw(c-201.032,110.685) -201.032,113.685 ; -204,-5.896 ccw(c-201,-5.896) -201,-8.896 139.299,-8.896 ; -201.032,113.671 139.295,113.671 cw(c139.295,110.671) 142.295,110.671 142.295,-5.915 ; 139.299,-8.915 ccw(c139.299,-5.915) 142.299,-5.915
Mechanical 16:
  lines w0.254: 31.882,97.465 37.089,97.465 ; 37.089,97.465 ccw(c37.089,100.531) 39.258,98.363 41.28,100.386 43.176,102.282 cw(c45.344,100.114) 45.344,103.18 53.472,103.18 cw(c53.472,100.114) 55.641,102.282 66.798,91.124 cw(c64.63,88.956) 67.696,88.956 67.696,84.638 cw(c64.63,84.638) 66.798,82.47 cw(c65.594,83.675) 65.594,81.971 61.219,81.971 cw(c61.219,85.037) 59.051,82.869 58.181,83.74 ccw(c56.012,81.572) 56.012,84.638 41.28,84.638 cw(c41.28,87.704) 39.112,85.536 37.734,86.915 ccw(c35.565,84.747) 35.565,87.813 26.124,87.813 ccw(c26.124,86.079) 24.897,87.305 24.473,86.88 cw(c22.738,88.615) 22.738,86.162 21.087,86.162 cw(c21.087,87.432) 19.817,87.432 19.817,96.195 cw(c21.087,96.195) 21.087,97.465 23.627,97.465 37.089,97.465

## Dimensions
-204.032,110.685 to 142.295,110.671 on top dimensions
139.295,113.671 to 139.299,-8.896 on top dimensions
139.299,-8.896 to 139.295,113.671 on bot dimensions
142.295,110.671 to -204.032,110.685 on bot dimensions